# Altium PCB board.PcbDoc
Units mm, origin at the board's own origin, x right, y up, seen from the top; angles counter-clockwise.
Board outline 100 x 60 mm, 2 copper layers (Top Layer, Bottom Layer), stack 1.57 mm thick; 27 components, 21 nets, 95 pads, 20 vias.
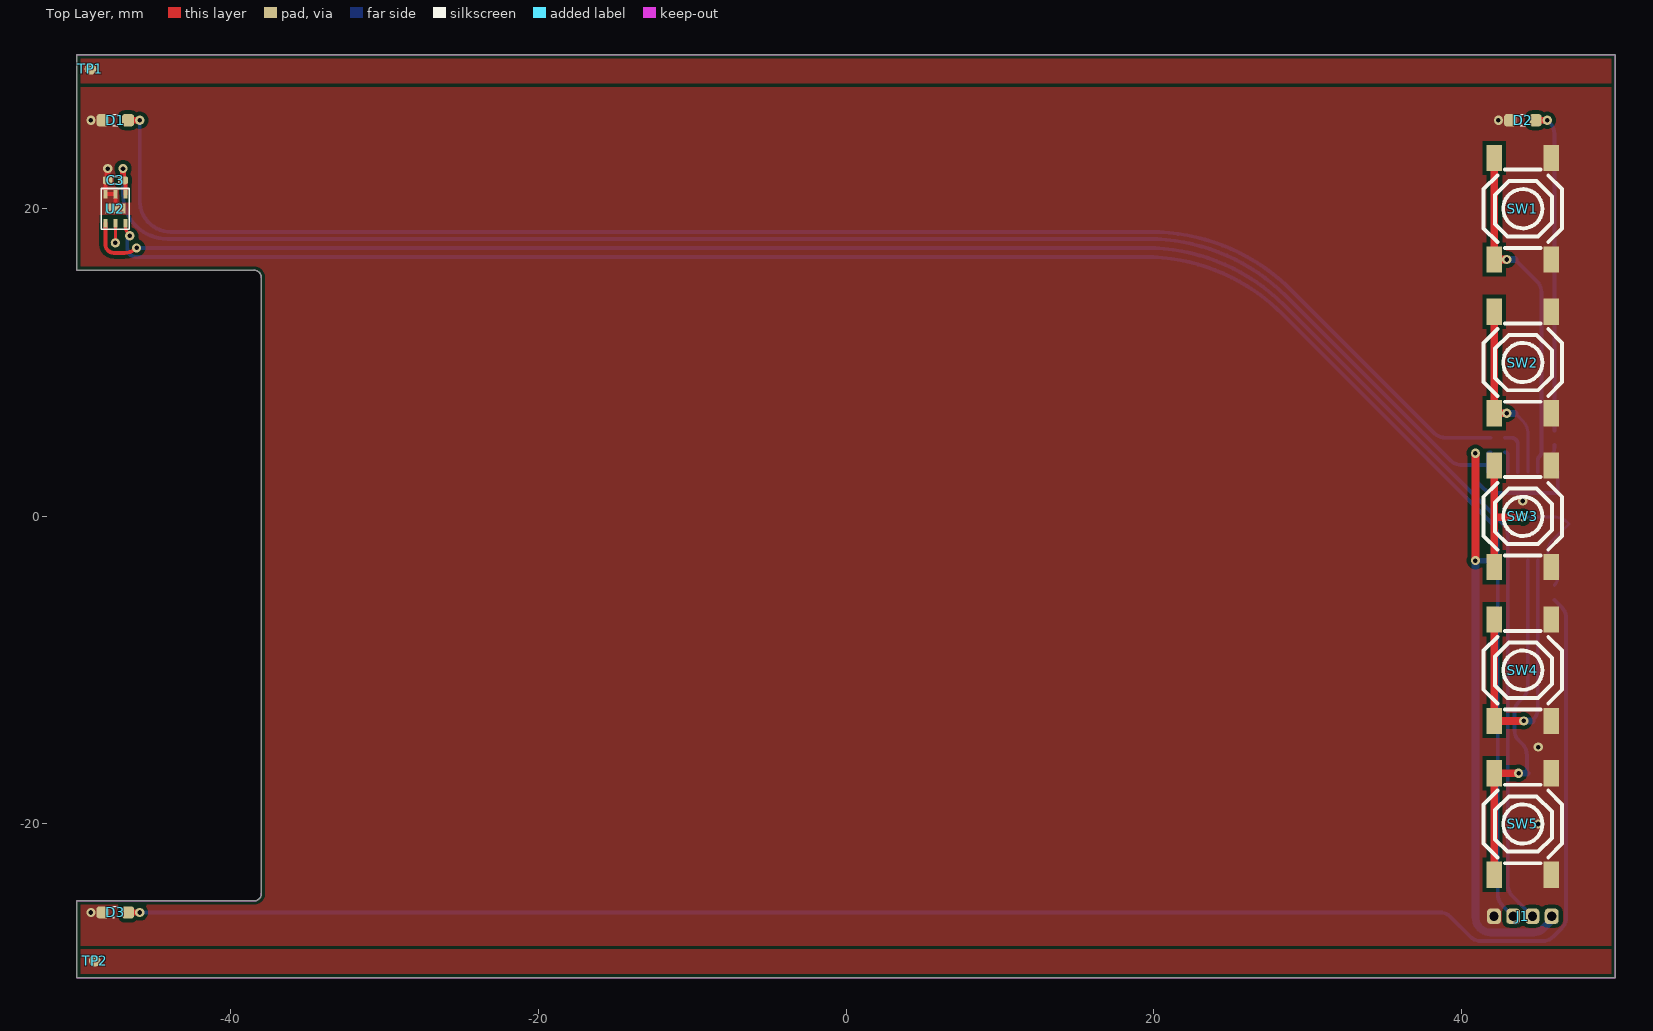
[diagram p0: Top Layer view]
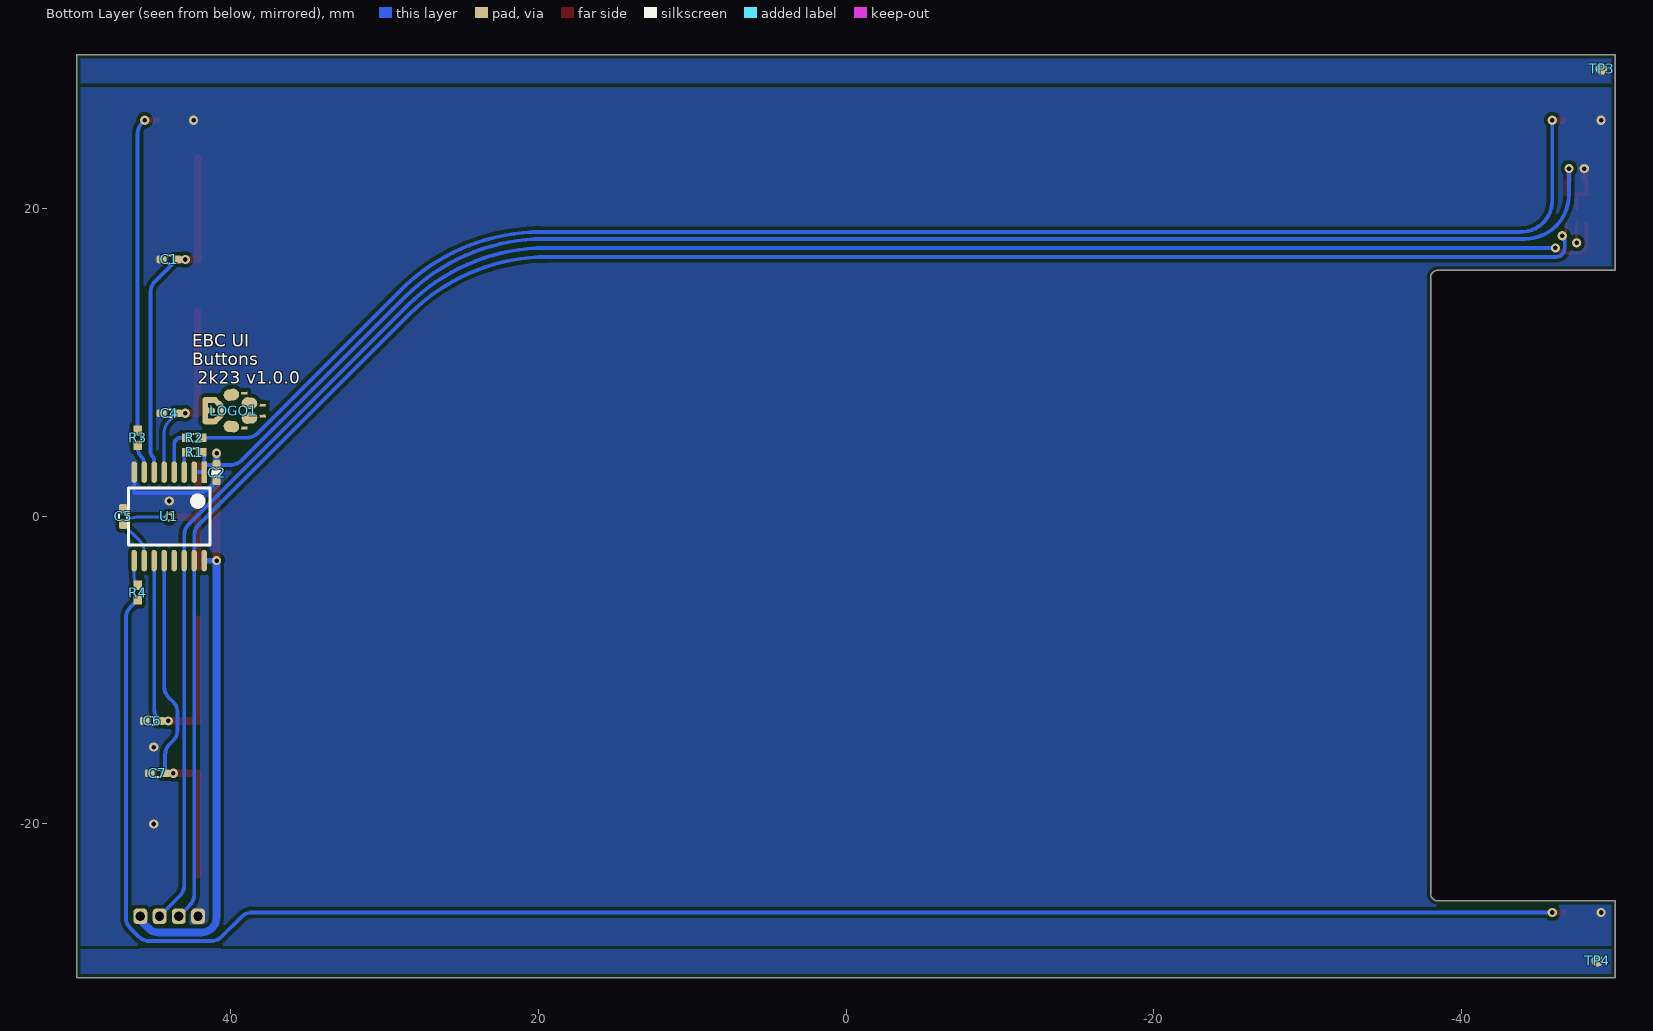
[diagram p1: Bottom Layer view, seen from below]
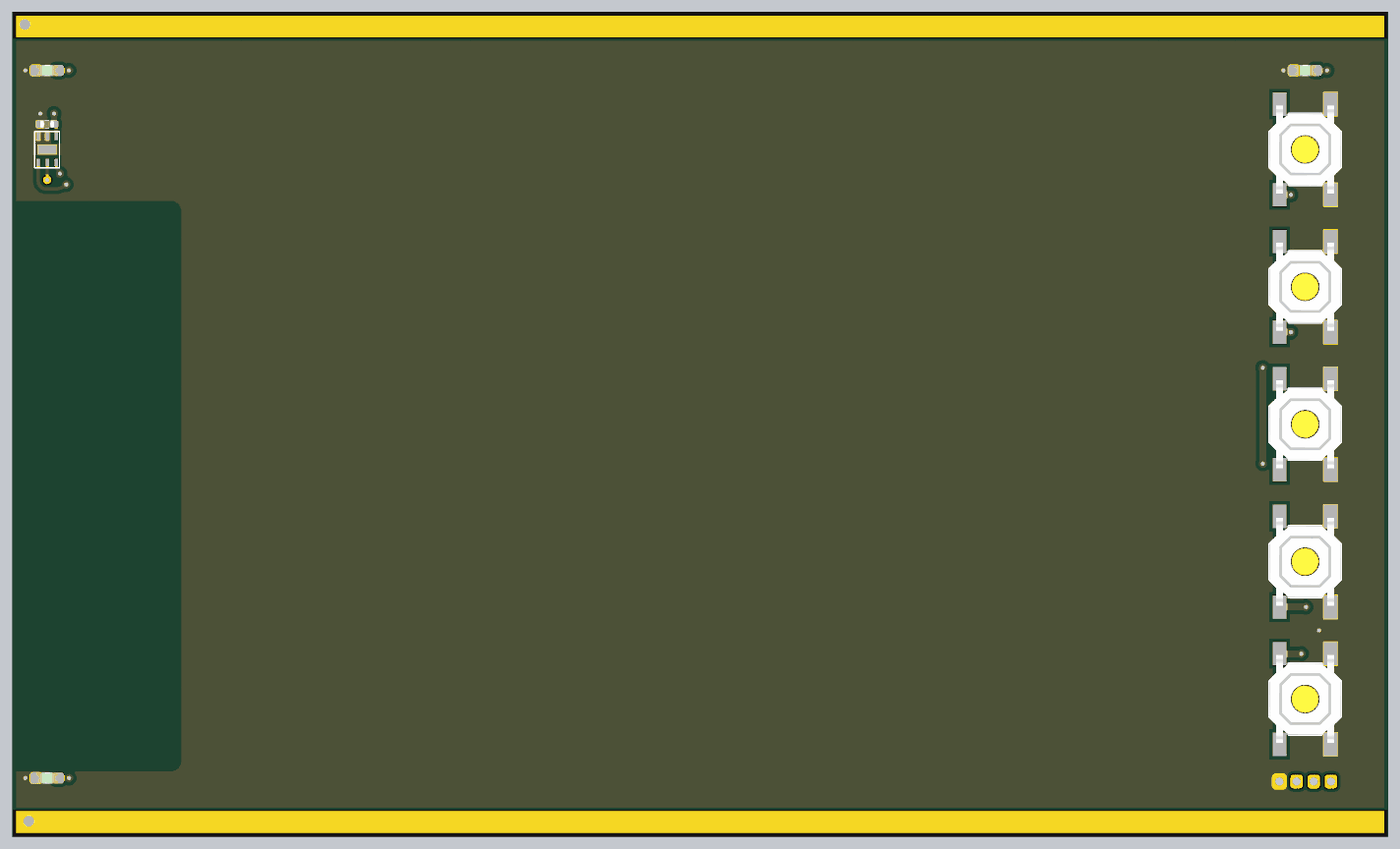
[diagram p2: 3D render of the assembled board from above, using the file's embedded part models]
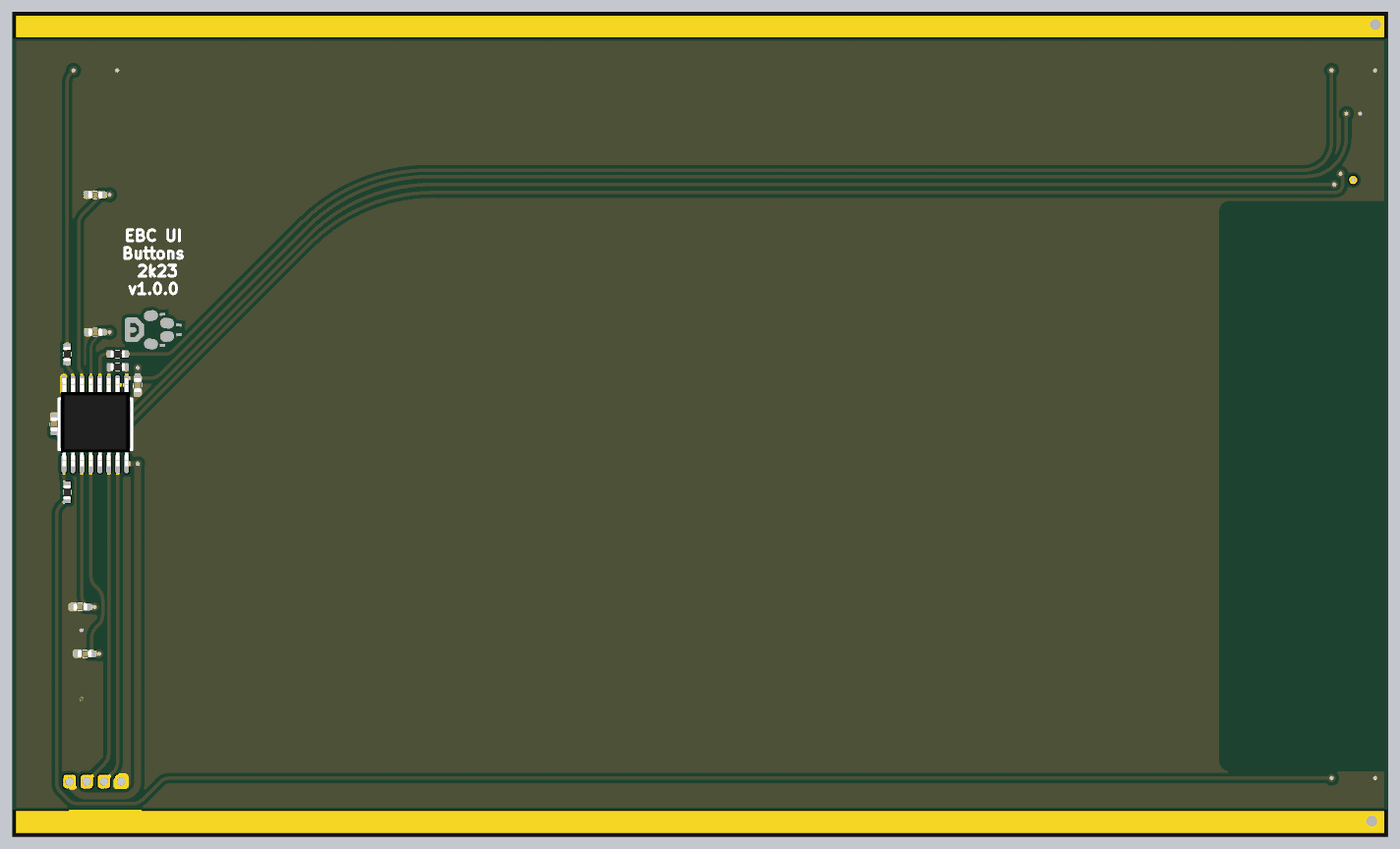
[diagram p3: 3D render of the assembled board from below, using the file's embedded part models]

## Layer stack, top to bottom
Top Solder: solder mask 0.0127, Solder Resist, Dk 3.8
Top Layer: signal copper 0.035
Dielectric: core 1.5, FR-4, Dk 4.5
Bottom Layer: signal copper 0.035
Bottom Solder: solder mask 0.0127, Solder Resist, Dk 3.8

## Board outline
-50,-25 -38.477,-25 -38.5,-25.001 ccw(c-38.5,-24.501) -38,-24.501 -38,-24.523 -38,15.501 ccw(c-38.5,15.501) -38.5,16.001 -38.477,16 -50,16 -50,30 50,30 50,-30 -50,-30

## Design rules (kind name [scope] priority, off if disabled: settings)
AcuteAngle [All] p1: minimum=6.00000000000000E+0001 checktracksonly=FALSE
Clearance Clearance_1 [All] p1: gap=0.25 ignorepadtopadclearanceinfootprint=FALSE except(0.13: Arc-Arc Arc-Track Arc-SMDPad Arc-Via Track-Track Track-SMDPad Track-Via SMDPad-SMDPad SMDPad-Via THPad-Via Via-Via; 0.15: Arc-THPad Arc-Text Arc-Hole Track-THPad Track-Text Track-Hole SMDPad-THPad SMDPad-Text SMDPad-Hole THPad-THPad THPad-Text THPad-Hole Via-Text Via-Hole Fill-Text Fill-Hole Poly-Text Poly-Hole Region-Text Region-Hole Text-Text Text-Hole)
ComponentClearance ComponentClearance_1 [OnLayer('Mechanical 15') vs HasFootprint('CONN_FPC_31P-P0.50_0.5K-AS-31PWB') or HasFootprint('HDR-1X10_2.54')] p1: gap=-1 collisioncheckmode=3 verticalgap=2540 showdistances=FALSE
ComponentClearance ComponentClearance_2 [OnLayer('Mechanical 15')] p2: gap=0.001 collisioncheckmode=3 verticalgap=0.001 showdistances=FALSE
ComponentClearance [All] p3: gap=0.2 collisioncheckmode=3 verticalgap=0.2 showdistances=FALSE
Height [All] p1: minheight=0 maxheight=500 prefheight=12.7
HoleSize [All] p1: absolutevalues=TRUE maxlimit=6 minlimit=0.2 maxpercent=80.000 minpercent=20.000
HoleToHoleClearance HoleToHoleClearance_1 [IsVia vs IsThruPin] p1: gap=0.7 allowstackedmicrovias=TRUE
HoleToHoleClearance [All] p2: gap=0.5 allowstackedmicrovias=TRUE
MinimumSolderMaskSliver [All] p1 off: minsoldermaskwidth=0.254
PlaneClearance [All] p1: clearance=0.45
PlaneConnect [All] p1: planeconnectstyle=Direct reliefexpansion=0.3 reliefentries=4 reliefconductorwidth=0.381 reliefairgap=0.178
PolygonConnect [All] p1: connectstyle=Direct reliefconductorwidth=0.381 reliefentries=4 polygonreliefangle="90 Angle" airgapwidth=0.356
RoutingVias [All] p1: holewidth=0.3 width=0.6 viastyle="Through Hole" minholewidth=0.2 minwidth=0.45 maxholewidth=0.9 maxwidth=1.27
SilkToSilkClearance [All] p1 off: silktosilkclearance=0.254
SilkToSolderMaskClearance [IsPad] p1 off: minsilkscreentomaskgap=0.254 clearancetoexposedcopper=TRUE
SolderMaskExpansion [All] p1: expansion=0.102 istentingtop=FALSE
UnRoutedNet [All] p1: checkbadconnections=TRUE
Width [All] p1: maxlimit=3.81 minlimit=0.14 preferedwidth=0.254
20 further rules are at their usual default settings.

## Components (designator, comment, footprint, x,y, rotation, side; value= is the part's Value field where it differs from the comment)
C1 "100n" C0402 44,16.7 r180 bottom
C2 "100n" C0402 40.919,2.845 r90 bottom
C3 "100n" C0402 -47.5,21.844 r0 top
C4 "100n" C0402 44,6.7 r180 bottom
C5 "100n" C0402 47,0 r270 bottom
C6 "100n" C0402 45.092,-13.3 r180 bottom
C7 "100n" C0402 44.762,-16.7 r180 bottom
D1 "GRN" LED-0603-GRN -47.5,25.75 r0 top
D2 "GRN" LED-0603-GRN 44,25.75 r0 top
D3 "GRN" LED-0603-GRN -47.5,-25.75 r0 top
J1 "Header 4" HDR-1x4-P1.25 44,-26 r180 top
LOGO1 "LOGO" LOGO 41.656,6.872 r270 bottom
R1 "10k" R0402 42.375,4.166 r180 bottom
R2 "470" R0402 42.375,5.105 r180 bottom
R3 "470" R0402 46.05,5.106 r90 bottom
R4 "470" R0402 46.05,-4.953 r270 bottom
SW1 "TS-1187A-B-A-B" SW-SMD_4P-L5.1-W5.1-P3.70-LS6.5-TL-2 44,20 r90 top
SW2 "TS-1187A-B-A-B" SW-SMD_4P-L5.1-W5.1-P3.70-LS6.5-TL-2 44,10 r90 top
SW3 "TS-1187A-B-A-B" SW-SMD_4P-L5.1-W5.1-P3.70-LS6.5-TL-2 44,0 r90 top
SW4 "TS-1187A-B-A-B" SW-SMD_4P-L5.1-W5.1-P3.70-LS6.5-TL-2 44,-10 r90 top
SW5 "TS-1187A-B-A-B" SW-SMD_4P-L5.1-W5.1-P3.70-LS6.5-TL-2 44,-20 r90 top
TP1 "" TP30_SMD -49.115,29.091 r90 top
TP2 "" TP30_SMD -48.84,-28.884 r90 top
TP3 "" TP30_SMD -49.115,29.091 r90 bottom
TP4 "" TP30_SMD -48.84,-28.884 r90 bottom
U1 "TCA6408APWR" TSSOP-16 44,0 r270 bottom
U2 "OPT3001DNPR" USON6_L2.1-W2.1-P0.65-BL-EP -47.5,20 r180 top locked

## Footprints (in the part's own frame and the unit in brackets; to place one, negate y for a bottom-side part, rotate by r counter-clockwise, add the part's x,y. Pads: shape width x height; smd on the part's side, far side on the other; paste and mask are expansions set on the pad)
C0402 [mm] "Chip Capacitor Body"
  rrect50% 0.635x0.508 smd mask+0.05: 1(-0.5,0) 2(0.5,0)
  silkscreen extent -0.13,-0.25 0.13,0.25, body extent -0.52,-0.27 0.53,0.28, height 0.55
HDR-1x4-P1.25 [mm]
  rrect50% 0.9x1 hole 0.6: 1(-1.875,0) 2(-0.625,0) 3(0.625,0) 4(1.875,0)
LED-0603-GRN [mm]
  rrect50% 0.8x0.8 smd mask+0.05: 1(0.825,0) 2(-0.825,0)
  silkscreen extent -0.18,-0.4 0.2,0.4, body extent -0.8,-0.4 0.8,0.4, height 0.6
LOGO [mil]
  rect 15.75x7.87 smd rot 93 mask+4: ""(-44.55,100)
  oval 30x40 smd rot 8 mask+4: ""(-40.55,67)
  oval 15x39.5 smd mask+4: ""(-27.5,12.5) ""(27.5,12.5)
  oval 15x36.21 smd rot 135 mask+4: ""(-20,32.5)
  oval 30x40 smd rot 173 mask+4: ""(-18.99,113.27)
  rect 15.75x7.87 smd rot 83 mask+4: ""(-13.91,147.15)
  oval 70x15 smd mask+4: ""(0,0)
  oval 15x32.5 smd mask+4: ""(0,9)
  oval 39.5x15 smd mask+4: ""(0,40)
  rect 15.75x7.87 smd rot 97 mask+4: ""(13.91,147.15)
  oval 30x40 smd rot 7 mask+4: ""(18.99,113.27)
  oval 15x36.21 smd rot 45 mask+4: ""(20,32.5)
  oval 30x40 smd rot 172 mask+4: ""(40.55,67)
  rect 15.75x7.87 smd rot 87 mask+4: ""(44.55,100)
R0402 [mm]
  rrect10% 0.635x0.55 smd mask+0.05: 1(-0.476,0) 2(0.476,0)
  silkscreen extent -0.12,-0.25 0.13,0.25, body extent -0.52,-0.27 0.53,0.28, height 0.4
SW-SMD_4P-L5.1-W5.1-P3.70-LS6.5-TL-2 [mm]
  rect 1.7x1 smd paste+0 mask+0.051: 1(-3.3,1.85) 2(3.3,1.85) 3(-3.3,-1.85) 4(3.3,-1.85)
  silkscreen extent -2.55,-2.55 2.55,2.55, body extent -3.2,-2.6 3.2,2.6, height 1.55
TP30_SMD [mil] "TP30_SMD"
  round 30 smd mask+1.97: 1(0,0)
TSSOP-16 [mm]
  rect 1.4x0.35 smd: 1(-2.875,2.275)
  oval 1.4x0.35 smd: 2(-2.875,1.625) 3(-2.875,0.975) 4(-2.875,0.325) 5(-2.875,-0.325) 6(-2.875,-0.975) 7(-2.875,-1.625) 8(-2.875,-2.275) 9(2.875,-2.275) 10(2.875,-1.625) 11(2.875,-0.975) 12(2.875,-0.325) 13(2.875,0.325) 14(2.875,0.975) 15(2.875,1.625) 16(2.875,2.275)
  silkscreen extent -2.89,-2.65 1.85,3.18, body extent -3.34,-2.5 3.06,2.5, height 1.21
USON6_L2.1-W2.1-P0.65-BL-EP [mm]
  rect 0.25x0.55 smd paste+0 mask+0.051: 1(-0.65,-0.95) 2(0,-0.95) 3(0.65,-0.95) 4(0.65,0.95) 5(0,0.95) 6(-0.65,0.95)
  rect 1.35x0.65 smd paste+0 mask+0.051: 7(0,0)
  silkscreen extent -0.89,-1.31 0.91,1.34, body extent -1,-1 1,1, height 0.65

## Part data
C1 C2 C3 C4 C5 C6 C7: library part Cap
D1 D2 D3: library part LED-0603-GREEN, "LED 0603 GRN", LCSC part number=C434420, P/N=SZYY0603G
J1: library part "Header 3", LCSC part number=-, P/N=-
R1: library part RES_0402_1K5-1%
R2 R3 R4: library part RES_0402_220R-1%, LCSC part number=C112291, P/N=RC0402FR-07220RL
SW1 SW2 SW3 SW4 SW5: library part Component_1, LCSC part number=C318884, P/N=TS-1187A-B-A-B
TP1 TP2 TP3 TP4: library part TP_Dup1, LCSC part number=-, P/N=-
U1: LCSC part number=C206177, P/N=TCA6408APWR
U2: LCSC part number=C90462, P/N=OPT3001DNPR

## Free pads (board coordinates)
  round 0.6 hole 0.3: 5(-47.5,17.78)

## Via types
v1: diameter 0.6, hole 0.3, Top Layer to Bottom Layer, tented both sides, 20 vias

## Nets (pads, with @x,y where several pads share a name; then routed paths per layer and width w, separated by ;. In a path a pad name is that pad's centre, name@x,y a point inside that pad or via, vN(x,y) a via of type N, cw(c..) or ccw(c..) an arc to the next point about the centre after c; other vN are vias at no path point)
3V3: C2.2 C3.2 J1.1 R1.2 U1.1 U1.2 U1.16 U2.1 | length 139.2
  Top Layer w0.25: C3.2 -46.85,21.844 U2.1
  Top Layer w0.4: C3.2 v1(-47,22.606)
  Top Layer w0.5: v1(40.919,-2.875) v1(40.919,4.107)
  Bottom Layer w0.25: v1(-47,22.606) -47,20.923 ccw(c-44.111,20.923) -44.111,18.034 19.64,18.034 cw(c19.64,5.356) 28.605,14.321 39.291,3.635 ccw(c39.992,4.335) 39.992,3.345 C2.2 U1.1@41.725,3.345 ; R1.2 ccw(c41.899,3.992) 41.725,3.992 U1.1@41.725,3.345 ; U1.2 U1.1 U1.1@41.725,3.345
  Bottom Layer w0.35: v1(40.919,-2.875) U1.16
  Bottom Layer w0.4: C2.2 v1(40.919,4.107)
  Bottom Layer w0.5: v1(40.919,-2.875) 40.919,-26.06 ccw(c41.91,-26.06) 41.91,-27.051 44.7,-27.051 ccw(c44.7,-26.184) 45.314,-26.797 45.708,-26.402 ccw(c45.306,-26) J1.1
BTN0: C1.2 SW1.1 SW1.2 U1.6 | length 22.5
  Top Layer w0.5: SW1.1 SW1.2 ; SW1.1@42.201,16.7 v1(42.963,16.7)
  Bottom Layer w0.25: C1.2 44.922,15.278 cw(c44.221,14.578) 45.212,14.578 45.212,4.229 cw(c44.692,4.229) 45.06,3.861 ccw(c45.264,3.657) 44.975,3.657 U1.6
  Bottom Layer w0.45: v1(42.963,16.7) C1.2
BTN1: C4.2 SW2.1 SW2.2 U1.5 | length 12
  Top Layer w0.5: SW2.1 SW2.2 ; SW2.1@42.201,6.7 v1(42.963,6.7)
  Bottom Layer w0.2: C4.2 44.035,6.165 cw(c43.334,5.465) 44.325,5.465 U1.5
  Bottom Layer w0.45: v1(42.963,6.7) C4.2
BTN2: C5.2 SW3.1 SW3.2 U1.10 | length 14.5
  Top Layer w0.5: SW3.1 42.15,-0.05 ; SW3.2 42.15,-0.05 ; v1(44,-0.05) 42.15,-0.05
  Bottom Layer w0.2: v1(44,-0.05) 46.139,-0.05 cw(c46.139,-1.04) 46.84,-0.34 C5.2 45.915,-1.585 ccw(c46.616,-2.285) 45.625,-2.285 U1.10
BTN3: C6.2 SW4.1 SW4.2 U1.11 | length 19.6
  Top Layer w0.5: SW4.2 SW4.1 v1(44.055,-13.3)
  Bottom Layer w0.25: C6.2 44.685,-13.207 ccw(c43.984,-12.507) 44.975,-12.507 U1.11
  Bottom Layer w0.45: v1(44.055,-13.3) C6.2
BTN4: C7.2 SW5.1 SW5.2 U1.12 | length 23.1
  Top Layer w0.5: SW5.1 SW5.2 v1(43.725,-16.7)
  Bottom Layer w0.25: C7.2 44.262,-15.513 ccw(c43.271,-15.513) 43.972,-14.813 43.75,-14.59 cw(c44.45,-13.89) 43.459,-13.89 43.459,-12.751 cw(c44.45,-12.751) 43.75,-12.05 44.035,-11.765 ccw(c43.334,-11.064) 44.325,-11.064 U1.12
  Bottom Layer w0.45: v1(43.725,-16.7) C7.2
EARTH0: TP1.1
EARTH1: TP2.1
EARTH2: TP3.1
EARTH3: TP4.1
GND: C1.1 C2.1 C3.1 C4.1 C5.1 C6.1 C7.1 D1.2 D2.2 D3.2 J1.4 SW1.3 SW1.4 SW2.3 SW2.4 SW3.3 SW3.4 SW4.3 SW4.4 SW5.3 SW5.4 U1.8 U2.2 U2.3 U2.7 | length 10.4
  Top Layer w0.25: C3.1 -48.15,21.844 U2.3 U2.2 U2.7
  Top Layer w0.4: C3.1 v1(-48,22.606)
  Bottom Layer w0.25: C2.1 41.45,1.814 ccw(c42.151,2.515) 42.151,1.524 46.275,1.524 U1.8
  other v1: -49.087,-25.75 45,-20 45,-15 44,1 -49.087,25.75 42.413,25.75
INT: pad.5 U2.5 | length 1.3
  Top Layer w0.2: pad.5 U2.5
NetD1_1: D1.1 R2.2 | length 99.9
  Top Layer w0.4: D1.1 v1(-45.913,25.75)
  Bottom Layer w0.25: v1(-45.913,25.75) -45.913,20.519 ccw(c-43.886,20.519) -43.886,18.491 19.8,18.491 cw(c19.8,5.524) 28.97,14.693 38.267,5.396 ccw(c38.967,6.096) 38.967,5.106 R2.2
NetD2_1: D2.1 R3.2 | length 21.1
  Top Layer w0.4: D2.1 v1(45.587,25.75)
  Bottom Layer w0.25: v1(45.587,25.75) 45.76,25.577 cw(c45.06,24.876) 46.05,24.876 R3.2
NetD3_1: D3.1 R4.2 | length 115.9
  Top Layer w0.4: D3.1 v1(-45.913,-25.75)
  Bottom Layer w0.25: v1(-45.913,-25.75) 38.599,-25.75 cw(c38.599,-26.741) 39.299,-26.04 40.578,-27.32 ccw(c41.279,-26.619) 41.279,-27.61 45.284,-27.61 ccw(c45.284,-26.619) 45.985,-27.32 46.522,-26.782 ccw(c45.822,-26.082) 46.812,-26.082 46.812,-6.601 ccw(c45.822,-6.601) 46.522,-5.901 R4.2
NetR1_1: R1.1 U1.3 | length 1.4
  Bottom Layer w0.25: R1.1 cw(c42.851,3.992) 43.025,3.992 U1.3
NetR2_1: R2.1 U1.4 | length 2.9
  Bottom Layer w0.25: R2.1 43.256,5.106 cw(c43.256,4.687) 43.675,4.687 U1.4
NetR3_1: R3.1 U1.7 | length 1.9
  Bottom Layer w0.25: U1.7 45.625,3.447 cw(c46.21,3.447) 45.796,3.861 ccw(c45.183,4.474) 46.05,4.474 R3.1
NetR4_1: R4.1 U1.9 | length 1.7
  Bottom Layer w0.2: R4.1 ccw(c45.507,-3.934) 46.275,-3.934 U1.9
SCL: J1.2 U1.14 U2.4 | length 125.7
  Top Layer w0.25: U2.4 -48.15,17.692 ccw(c-47.584,17.692) -47.584,17.127 -46.898,17.127 ccw(c-46.898,18.23) v1(-46.118,17.45)
  Bottom Layer w0.25: v1(-46.118,17.45) 19.513,17.45 cw(c19.513,4.771) 28.478,13.736 42.735,-0.52 cw(c42.034,-1.221) 43.025,-1.221 U1.14 43.025,-23.99 ccw(c44.016,-23.99) 43.315,-24.69 J1.2
SDA: J1.3 U1.15 U2.6 | length 123.4
  Top Layer w0.2: U2.6 -46.85,18.912 ccw(c-45.896,18.912) v1(-46.571,18.237)
  Bottom Layer w0.25: v1(-46.571,18.237) ccw(c-46.195,17.862) -46.726,17.862 -46.726,17.44 ccw(c-46.152,17.44) -46.152,16.866 19.412,16.866 cw(c19.412,4.187) 28.377,13.152 42.085,-0.556 cw(c41.384,-1.256) 42.375,-1.256 U1.15 42.375,-24.59 ccw(c43.366,-24.59) 42.665,-25.29 J1.3
pads on no net: LOGO1. U1.13

## Polygon pours and split planes (outlines as drawn)
GND on Top Layer "NONET_L02_P-001" (solid, remove dead copper, pour order 0): -50,30 -50,-30 50,-30 50,30
EARTH0 on Top Layer "NONET_L02_P-001" (solid, pour order 4): 50,28.067 -50,28.067 -50,30 50,30
EARTH1 on Top Layer "NONET_L02_P-001" (solid, pour order 2): -50,-28.067 50,-28.067 50,-30 -50,-30
GND on Bottom Layer "NONET_L02_P-001" (solid, remove dead copper, pour order 1): -50,30 -50,-30 50,-30 50,30
EARTH2 on Bottom Layer "NONET_L02_P-001" (solid, pour order 5): -50,28.067 50,28.067 50,30 -50,30
EARTH3 on Bottom Layer "NONET_L02_P-001" (solid, pour order 3): 50,-28.067 -50,-28.067 -50,-30 50,-30

## Keep-outs
Keep-Out Layer:
  lines w0: -38.5,-25.001 ccw(c-38.5,-24.501) -38,-24.501 ; -38.5,16.001 cw(c-38.5,15.501) -38,15.501
  lines w0.001: -50,-28 -50,-30 ; -50,28 -50,30 ; -38.477,-25 -50,-25 -50,-30 ; -38.477,16 -50,16 -50,30 ; -38,-24.523 -38,15.501 ; -50,-30 50,-30 ; -50,-30 50,-30 ; -50,30 50,30 ; -50,30 50,30 ; 50,-30 50,30

## Other copper
Multi-Layer:
  pour cut-out: 50,-27.9 -50,-27.9 -50,-28 50,-28
  pour cut-out: -50,27.9 50,27.9 50,28 -50,28

## Silkscreen, mask and mechanical layers (free items; w line width, h text height)
Bottom Overlay:
  text "EBC UI / Buttons /  2k23 v1.0.0" at 42.51,8.611 h0.8
Top Solder:
  rectangle: -50,-30 50,-28.067
  region: 50,30 -50,30 -50,28.067 50,28.067
Bottom Solder:
  region: 50,-28.067 -50,-28.067 -50,-30 50,-30
  rectangle: -50,28.067 50,30
Mechanical 2:
  lines w0.05: -50,-28 50,-28 ; -50,28 50,28